# Altium PCB Alarmy.PcbDoc
Units mm, origin at the board's own origin, x right, y up, seen from the top; angles counter-clockwise.
Board outline 68.55 x 53.38 mm, 2 copper layers (Top Layer, Bottom Side); 20 components, 33 nets, 80 pads, 0 vias.
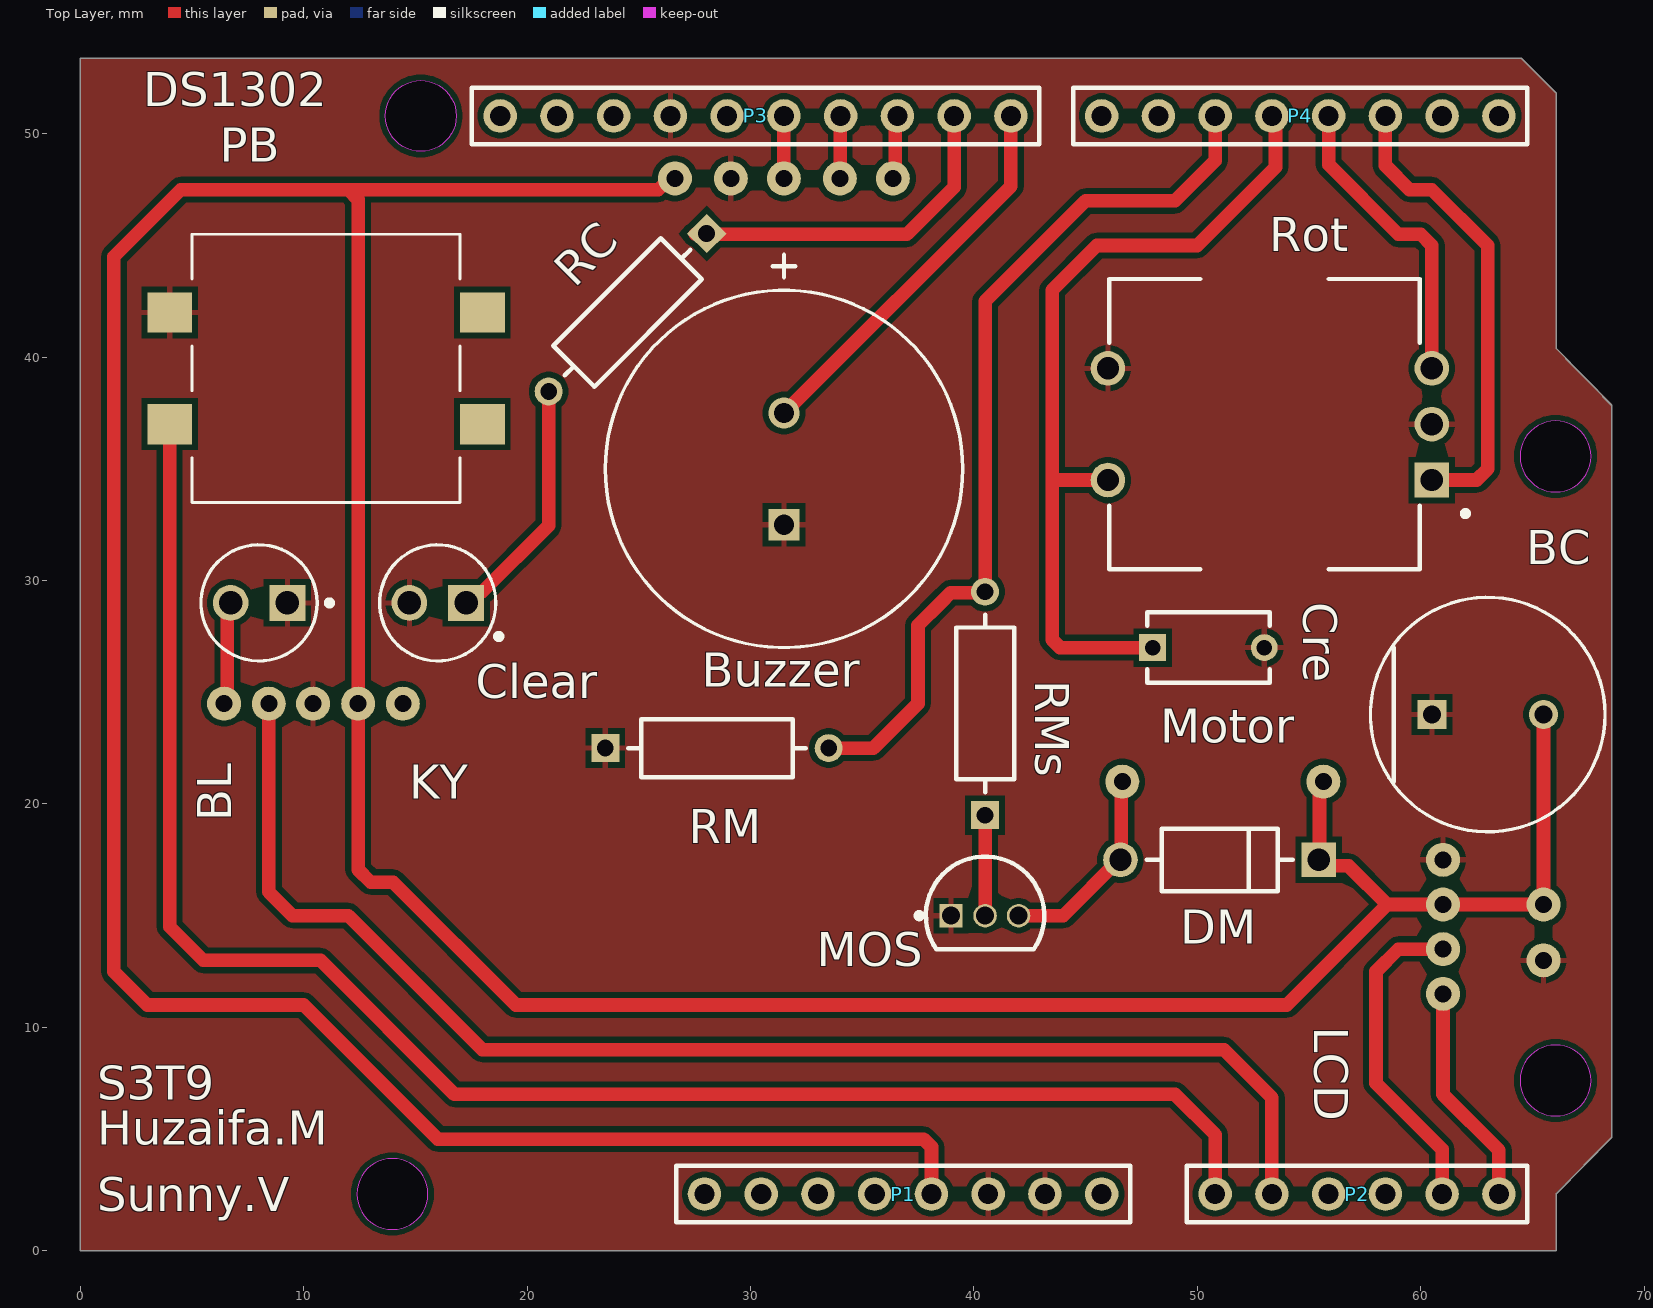
[diagram p0: Top Layer view]
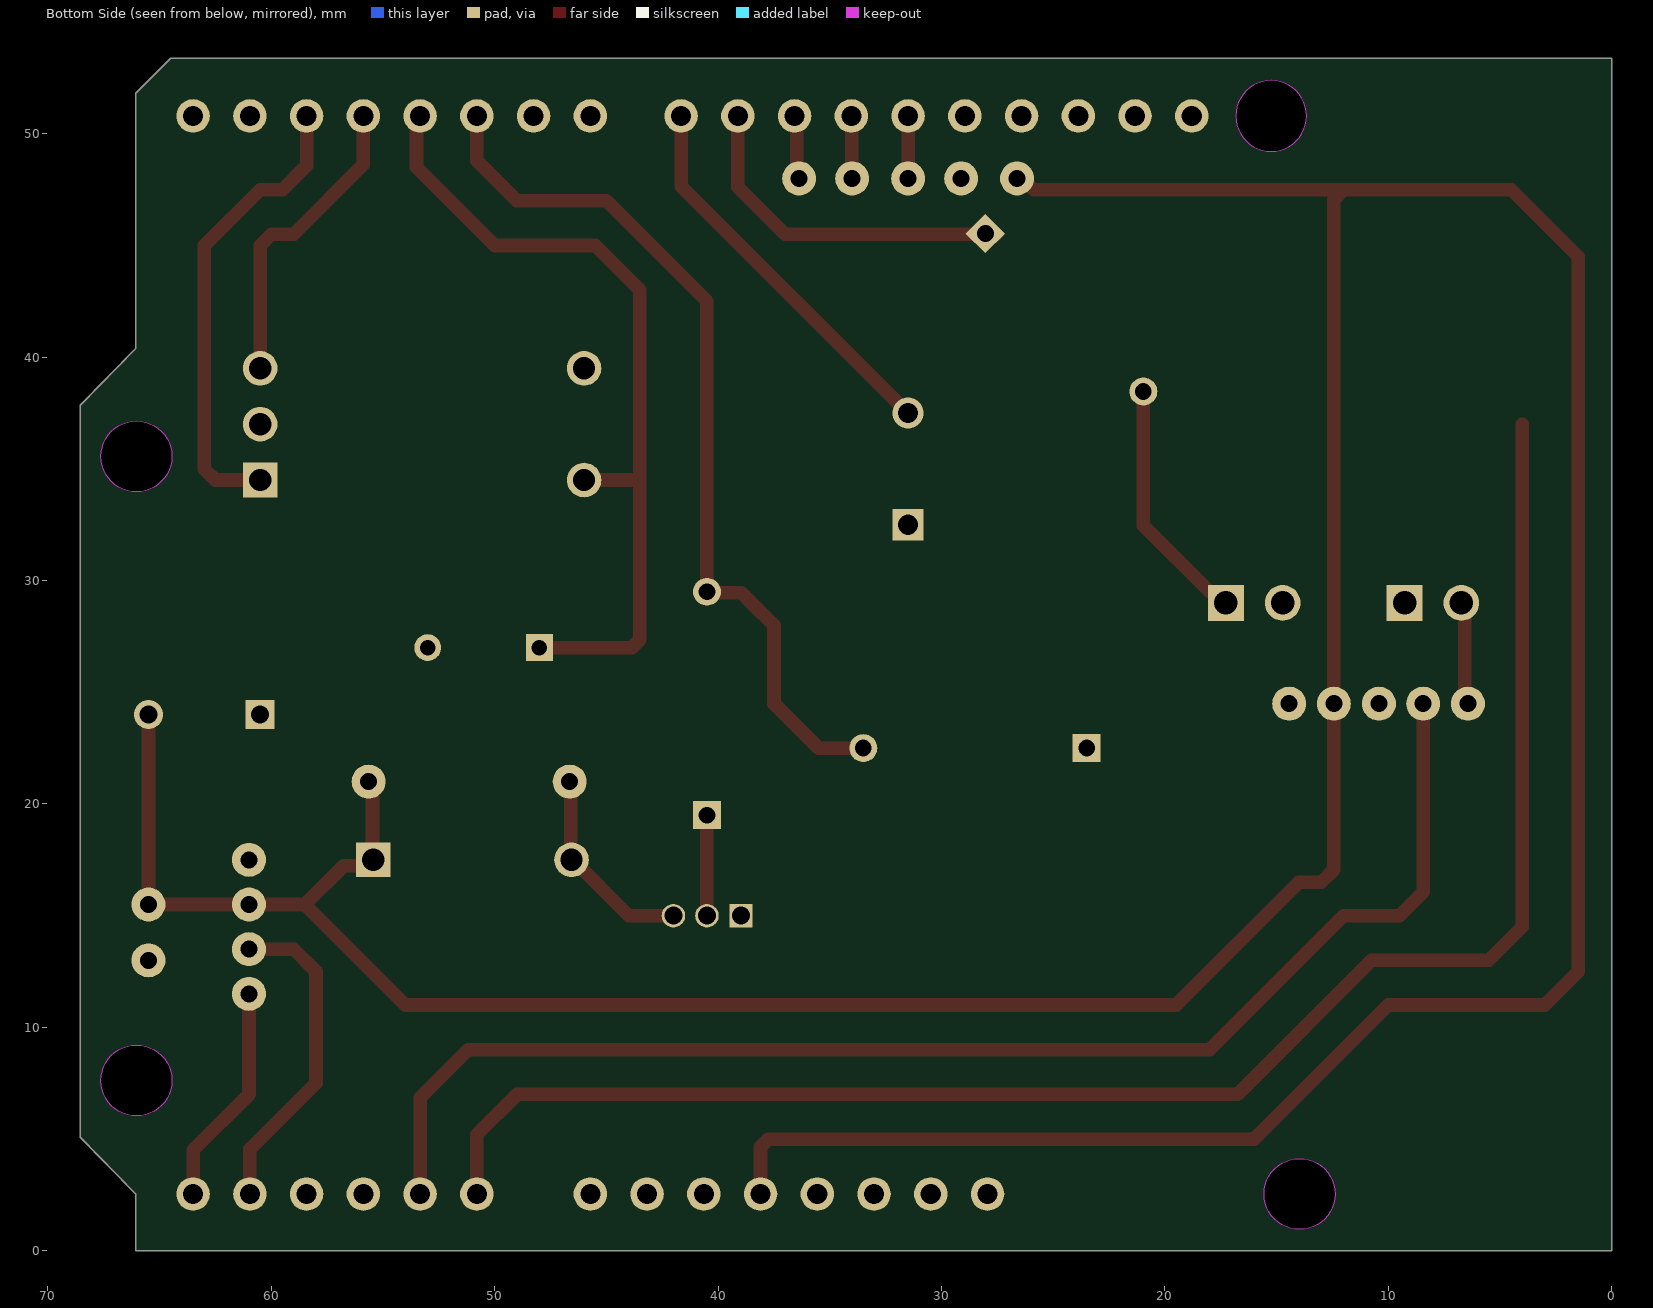
[diagram p1: Bottom Side view, seen from below]
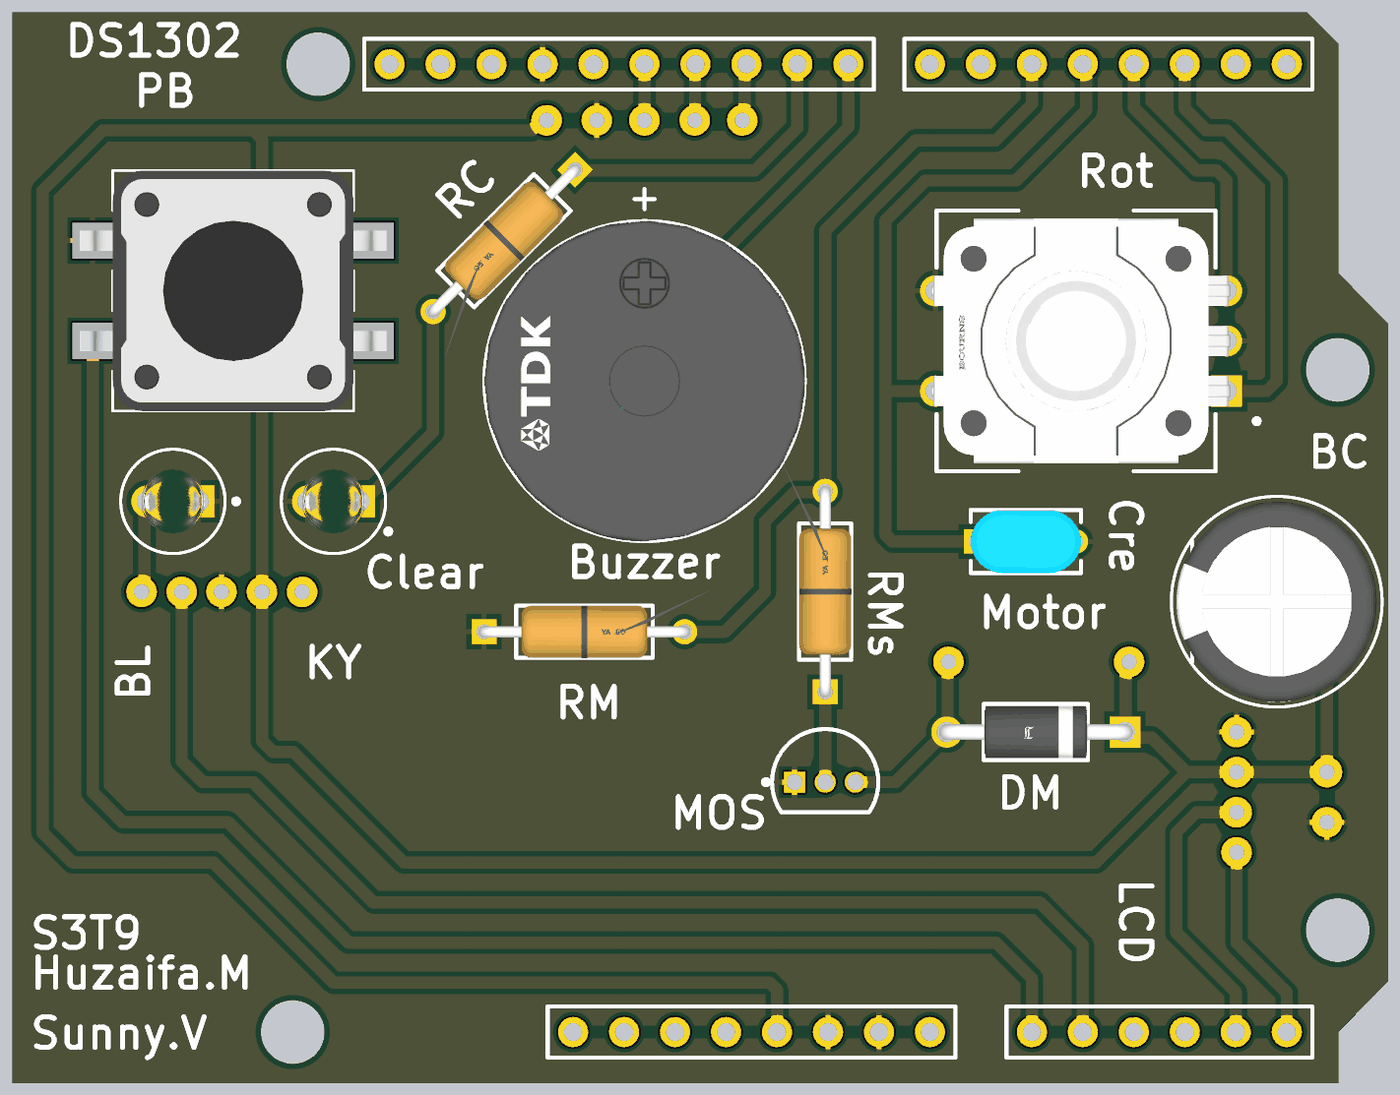
[diagram p2: 3D render of the assembled board from above, using the file's embedded part models]

## Layer stack, top to bottom
Top Layer: signal copper 0.0356
Dielectric 1: dielectric 0.32, FR-4, Dk 4.8
Bottom Side: signal copper (thickness not stored)

## Board outline
0,0 0,53.378 64.505,53.378 66.07,51.814 66.07,40.386 68.55,37.846 68.55,5.08 66.07,2.54 66.07,0
cut-out: 12.383,2.54 ccw(c13.97,2.54) 13.97,0.953 ccw(c13.97,2.54) 15.557,2.54 ccw(c13.97,2.54) 13.97,4.127 ccw(c13.97,2.54)
cut-out: 15.24,49.212 cw(c15.24,50.8) 13.652,50.8 cw(c15.24,50.8) 15.24,52.387 cw(c15.24,50.8) 16.828,50.8 cw(c15.24,50.8)
cut-out: 64.453,35.56 ccw(c66.04,35.56) 66.04,33.972 ccw(c66.04,35.56) 67.627,35.56 ccw(c66.04,35.56) 66.04,37.148 ccw(c66.04,35.56)
cut-out: 64.453,7.62 ccw(c66.04,7.62) 66.04,6.032 ccw(c66.04,7.62) 67.627,7.62 ccw(c66.04,7.62) 66.04,9.207 ccw(c66.04,7.62)

## Design rules (kind name [scope] priority, off if disabled: settings)
Clearance [All] p1: gap=0.254 ignorepadtopadclearanceinfootprint=FALSE
DiffPairsRouting [All] p1: maxlimit=0.254 minlimit=0.254 mostfreqgap=0.254 toplayer_minwidth=0.381 toplayer_maxwidth=0.381 toplayer_prefwidth=0.381 bottomlayer_minwidth=0.381 bottomlayer_maxwidth=0.381 bottomlayer_prefwidth=0.381 substack1={E69F8F93-CCC5-492F-B42F-9A974EFE4D76} toplayer_{e69f8f93-ccc5-492f-b42f-9a974efe4d76}_minwidth=0.381 toplayer_{e69f8f93-ccc5-492f-b42f-9a974efe4d76}_maxwidth=0.381 toplayer_{e69f8f93-ccc5-492f-b42f-9a974efe4d76}_prefwidth=0.381 bottomlayer_{e69f8f93-ccc5-492f-b42f-9a974efe4d76}_minwidth=0.381 bottomlayer_{e69f8f93-ccc5-492f-b42f-9a974efe4d76}_maxwidth=0.381 bottomlayer_{e69f8f93-ccc5-492f-b42f-9a974efe4d76}_prefwidth=0.381 maxuncoupledlength=12.7
PolygonConnect [All] p1: connectstyle=Relief reliefconductorwidth=0.254 reliefentries=4 polygonreliefangle="90 Angle" airgapwidth=0.254
RoutingVias [All] p1: holewidth=25.375 width=25.375 viastyle="Through Hole" minholewidth=25.375 minwidth=25.375 maxholewidth=25.375 maxwidth=25.375
SolderMaskExpansion [All] p1: expansion=0.102 istentingtop=FALSE
SupplyNets "Schematic Supply Nets" [InNet('GND')] p1: voltage=0.000
Width [All] p1: maxlimit=1.27 minlimit=0.61 preferedwidth=0.61 substack1={E69F8F93-CCC5-492F-B42F-9A974EFE4D76}
29 further rules are at their usual default settings.

## Components (designator, comment, footprint, x,y, rotation, side; value= is the part's Value field where it differs from the comment)
BC "ECA1HHG331B" FP-RAD-TH-D_10_0_5-L_16_1-MFG 63,24 r0 top (schematic designator C?)
BL "TLLG4400-AS12" FP-6_544-5255_01-4-MFG 8,29 r180 top (schematic designator Black)
Buzzer "Comment" FP-SD1614T5-A1-MFG 31.5,35 r90 top
Clear "TLLG4400-AS12" FP-6_544-5255_01-4-MFG 16,29 r180 top
Cre "RDER71H105K2K1H03B" FP-RDE2M1-MFG 50.5,27 r0 top
DM "1N4007" FP-1N4007-MFG 51,17.5 r180 top value=15pF (schematic designator D?)
DS1302 "DS1302" DS1302 26.488,46.47 r0 top
KY "IR" CustomIR 10.5,24.5 r0 top (schematic designator *)
LCD "LCD_I2C" LCD_I2C 57.905,20.317 r0 top
MOS "2N7000" ONSC-TO-92-3-29-11 40.5,15 r0 top (schematic designator Q?)
Motor "DC Motor" Motor 54,20.5 r180 top (schematic designator "DC Motor")
P1 "Header 8" HDR1X8 27.94,2.54 r0 top
P2 "Header 6" HDR1X6 50.8,2.54 r0 top
P3 "Header 10" HDR1X10 41.656,50.8 r180 top
P4 "Header 8" HDR1X8 63.5,50.8 r180 top
PB "430172073816" 430172073816 11,39.5 r0 top (schematic designator SW?)
RC "ZOR-25-R-52-0R" FP-ZOR-25-R-52-0R-MFG 24.5,42 r225 top
RM "ZOR-25-R-52-0R" FP-ZOR-25-R-52-0R-MFG 28.5,22.5 r0 top
RMs "ZOR-25-R-52-0R" FP-ZOR-25-R-52-0R-MFG 40.5,24.5 r90 top
Rot "PEC11R-4120K-S0018" FP-PEC11R-4120K-S0018-MFG 53,37 r90 top (schematic designator "Rotary Encoder")

## Footprints (in the part's own frame and the unit in brackets; to place one, negate y for a bottom-side part, rotate by r counter-clockwise, add the part's x,y. Pads: shape width x height; smd on the part's side, far side on the other; paste and mask are expansions set on the pad)
430172073816 [mm] "Tact Switch, SMD, body 12x12mm"
  rect 2x1.8 smd: A1(-7,2.5) A2(7,2.5) B1(-7,-2.5) B2(7,-2.5)
  silkscreen extent -6,-6 6,6, body extent -7.65,-6 7.65,6, height 7.3
CustomIR [mil]
  round 60 hole 30: 5V(76.22,-0.44) AO(-81.26,-0.44) DO(154.96,-0.44) GND(-3.15,-0.44) OUT(-160,-0.44)
DS1302 [mil]
  round 60 hole 30: CLK(197.01,60.24) DAT(295.75,60.24) GND(103.58,60.24) RST(389.17,60.24) VCC(5.16,60.24)
FP-1N4007-MFG [mm]
  rect 1.55x1.55 hole 1 paste-2539.97 mask+0: 1(-4.44,0)
  round 1.55 hole 1 paste-2539.97 mask+0: 2(4.44,0)
  silkscreen extent -3.26,-1.4 3.26,1.4, body extent -5.32,-1.5 5.32,1.5, height 0.25
FP-6_544-5255_01-4-MFG [mm]
  rect 1.6x1.6 hole 1.05 paste-2539.97 mask+0: 1(-1.27,0)
  round 1.6 hole 1.05 paste-2539.97 mask+0: 2(1.27,0)
  silkscreen extent -3.27,-2.6 2.6,2.6, body extent -2.32,-2.32 2.32,2.32, height 0.25
FP-PEC11R-4120K-S0018-MFG [mm]
  round 1.55 hole 1 paste-2539.97 mask+0: 1(-2.5,7) 2(2.5,7) B(2.5,-7.5) C(0,-7.5)
  rect 1.55x1.55 hole 1 paste-2539.97 mask+0: A(-2.5,-7.5)
  silkscreen extent -6.5,-9.13 6.5,6.95, body extent -7,-8.37 7,7.88, height 0.25
FP-RAD-TH-D_10_0_5-L_16_1-MFG [mm]
  rect 1.3x1.3 hole 0.8 paste-2539.97 mask+0: 1(-2.5,0)
  round 1.3 hole 0.8 paste-2539.97 mask+0: 2(2.5,0)
  silkscreen extent -5.25,-5.25 5.25,5.25, body extent -5.35,-5.35 5.35,5.35, height 0.25
FP-RDE2M1-MFG [mm]
  rect 1.2x1.2 hole 0.7 paste-2539.97 mask+0: 1(-2.5,0)
  round 1.2 hole 0.7 paste-2539.97 mask+0: 2(2.5,0)
  silkscreen extent -2.75,-1.58 2.75,1.58, body extent -3.2,-1.68 3.2,1.68, height 0.25
FP-SD1614T5-A1-MFG [mm]
  rect 1.4x1.4 hole 0.9 paste-2539.97 mask+0: 1(-2.5,0)
  round 1.4 hole 0.9 paste-2539.97 mask+0: 2(2.5,0)
  silkscreen extent -8,-8 9.57,8, body extent -8.1,-8.1 8.1,8.1, height 0.25
FP-ZOR-25-R-52-0R-MFG [mm]
  rect 1.25x1.25 hole 0.75 paste-2539.97 mask+0: 1(-5,0)
  round 1.25 hole 0.75 paste-2539.97 mask+0: 2(5,0)
  silkscreen extent -3.98,-1.3 3.98,1.3, body extent -5.72,-1.4 5.72,1.4, height 0.25
HDR1X6 [mm] "Connector; Header; 6 Position"
  round 1.5 hole 0.9: 1(0,0) 2(2.54,0) 3(5.08,0) 4(7.62,0) 5(10.16,0) 6(12.7,0)
  silkscreen extent -1.27,-1.27 13.97,1.27
HDR1X8 [mm] "Connector; Header; 8 Position"
  round 1.5 hole 0.9: 1(0,0) 2(2.54,0) 3(5.08,0) 4(7.62,0) 5(10.16,0) 6(12.7,0) 7(15.24,0) 8(17.78,0)
  silkscreen extent -1.27,-1.27 19.05,1.27
HDR1X10 [mm] "Connector; Header; 10 Position"
  round 1.5 hole 0.9: 1(0,0) 2(2.54,0) 3(5.08,0) 4(7.62,0) 5(10.16,0) 6(12.7,0) 7(15.24,0) 8(17.78,0) 9(20.32,0) 10(22.86,0)
  silkscreen extent -1.27,-1.27 24.13,1.27
LCD_I2C [mil]
  round 60 hole 30: GND(121.85,-110.91) SCL(121.85,-347.13) SDA(121.85,-268.39) VCC(121.85,-189.65)
Motor [mil]
  round 60 hole 30: M1(-64.69,-19.69) M2(289.65,-19.69)
ONSC-TO-92-3-29-11 [mm] "TO, 3-Leads, Body Dia 4.7mm, Pitch 1.27mm"
  rect 1.05x1.05 hole 0.8: 1(-1.524,0)
  round 1.05 hole 0.8: 2(0,0) 3(1.5,0)
  silkscreen extent -3.07,-1.51 2.65,2.65, body extent -2.58,-1.5 2.69,2.61, height 7.87

## Part data
BC: library part CMP-05427-000698-1, "Aluminum Electrolytic Capacitors (Radial Lead Type) AEC-Q200 Qualified 330uF ±20% 50V", Capacitance=330uF, Case/Package=Radial, Max Operating Temperature=105°C, Min Operating Temperature=-55°C, Package Quantity=500, Ripple Current=410mA, Tolerance=20%, Voltage Rating (DC)=50V, Construction=RADIAL, Contact Plating=Tin, Diameter=10mm, Height=16mm, Lead Diameter=0.6mm, Lead Pitch=5mm, Lead/Base Style=Straight, Length=16mm, Life (Hours)=2000Hour, Mount="Through Hole", Packaging="Ammo Pack", Radiation Hardening=No, RoHS Compliant=Yes, Series=NHG, Termination=Radial
BL Clear: library part CMP-02520-000017-1, "LED GREEN DIFFUSED T-1 T/H", Case/Package=T, Color=Green, Forward Current=7mA, Forward Voltage=2.4V, Max Operating Temperature=100°C, Min Operating Temperature=-40°C, Power Dissipation=20mW, Reverse Voltage=20V, Test Current=2mA, Depth=3.2mm, Dominant Wavelength=575nm, Length=3.2mm, Lens Style=Diffused, Luminous Intensity=2mcd, Mount="Through Hole", Number of Elements=1, Number of LEDs=1, Number of Pins=2, Packaging="Tape and Reel", Radiation Hardening=No, RoHS Compliant=No, Viewing Angle=50°
Buzzer: library part CMP-08413-000002-1, "AUDIO PIEZO TRANSDUCER 30V TH", Frequency=4kHz, Max Operating Temperature=70°C, Min Operating Temperature=-10°C, Operating Supply Voltage=3V, Package Quantity=1500, Diameter=17mm, Height=7.5mm, Lead Free="Lead Free", Mount="Through Hole", Packaging=Bulk, RoHS Compliant=Yes, Series=PS, Termination="PC Pins", Voltage Rating=3V, Washable=No
Cre: library part CMP-06035-050824-1, "Ceramic Capacitor 1uF ±10% 50V X7R Radial", Capacitance=1uF, Case/Package=Radial, Dielectric=X7R, Max Operating Temperature=125°C, Min Operating Temperature=-55°C, Package Quantity=500, Resistor Type=Ceramic, Tolerance=10%, Voltage Rating=50V, Height=4mm, Height - Seated (Max)=0.236inch, Lead Diameter=0.5mm, Lead Free="Lead Free", Lead Pitch=0.197inch, Lead/Base Style=Kinked, Length=0.217inch, Mount="Through Hole", Packaging=Bulk, Termination=Radial, Voltage Rating (DC)=50V, Width=0.124inch
DM: library part CMP-123542-000001-1, "Rectifier diode 1000 V 1 A DO-41, ,", Capacitance=15pF, Forward Current=1A, Manufacturer=Diotec, Max Junction Temp=+175°C, Max Repetitive Reverse Voltage=1000V, Max Surge Forward Current=27A, Peak Reverse Current=5uA, Temperature="-50°C to +175°C", Temperature Range Low=-50°C, Automotive=No, Category=Diode, ComponentLink2Description=Datasheet, ComponentLink2URL=https://datasheet.octopart.com/1N4007-Diotec-datasheet-62346875.pdf, Device Class L1="Discrete Semiconductors", Device Class L2=Diodes, Device Class L3="Rectifier Diodes", Height=2.8mm, Ipc Land Pattern Name=DIOAD888W100L520D280, Lead Free=Yes, Manufacturer Part Number=1N4007, Octopart=https://octopart.com/1n4007-diotec-4040411, Package=1N4007, Reverse Voltage=1000V, RoHS=TRUE, Temperature Range High=+175°C
MOS: library part CMP-1058-00936-1, "Small Signal MOSFET, 200 mA, 60 V, N-Channel, 3-Pin TO-92, Bulk Box", Manufacturer="On Semiconductor", Package Type=TO-92, Channel Polarity="N Channel", Ciss Typ (pF)=60, ComponentLink1Description="Manufacturer URL", ComponentLink1URL=http://www.onsemi.com/, ComponentLink2Description=Datasheet, ComponentLink2URL=http://www.onsemi.com/pub_link/Collateral/2N7000-D.PDF, ComponentLink3Description="Package Specification", ComponentLink3URL=http://www.onsemi.cn/pub_link/Collateral/2N6426-D.PDF, Configuration=Single, Coss Typ (pF)=25, Crss Typ (pF)=5, DatasheetVersion="Rev. 8", ID Max (A)=0.2, Mounting Technology="Through Hole", PackageDescription="3-Pin Transistor Outline, Body 4.825 x 3.685 mm, Pitch 1.27 mm", PackageReference=TO-92-3-29-11_AM_SL, PackageVersion="Rev. AM", Packing="Bulk Box", PartNumber=2N7000, PD Max (W)=0.35, V(BR)DSS Min (V)=60, VGS Max (V)=20, VGS(th) Max (V)=3
P1 P4: "Header, 8-Pin", LatestRevisionDate=17-Jul-2002, LatestRevisionNote="Re-released for DXP Platform.", Publisher="Altium Limited"
P2: "Header, 6-Pin", LatestRevisionDate=17-Jul-2002, LatestRevisionNote="Re-released for DXP Platform.", Publisher="Altium Limited"
P3: "Header, 10-Pin", LatestRevisionDate=17-Jul-2002, LatestRevisionNote="Re-released for DXP Platform.", Publisher="Altium Limited"
PB: library part CMP-03913-99472338-4, "Tactile Switch, 0.05A, 12Vdc, 160Gf, Smd Rohs Compliant: Yes", Current Rating=50mA, Insulation Resistance=100MΩ, Max Operating Temperature=85°C, Min Operating Temperature=-40°C, Voltage Rating=12V, Contact Plating=Silver, Height=7.3mm, Packaging="Tape and Reel", RoHS=Compliant
RC RM RMs: library part CMP-03413-000010-1, "RES 0 OHM JUMPER 1/4W AXIAL", Case/Package=Axial, Max Operating Temperature=155°C, Max Power Dissipation=250mW, Min Operating Temperature=-55°C, Package Quantity=5000, Resistance=0mR, Resistor Type="Carbon Film", Temperature Coefficient=100ppm/°C, Tolerance=5%, Construction=Cylindrical, Lead Free="Lead Free", Length=0.248inch, Military Standard=Not, Number of Terminations=2, Packaging="Tape and Reel", Power Rating=250mW, RoHS Compliant=Yes, Series=ZOR, Termination=Axial
Rot: library part CMP-07421-000027-1, "ROTARY ENCODER MECHANICAL 18PPR", Max Operating Temperature=70°C, Min Operating Temperature=-30°C, Package Quantity=75, Built in Switch=Yes, Detent=Yes, Encoder Type=Mechanical, Height=13.4mm, Hole Diameter=1.8mm, Length=26.5mm, Mount="Through Hole", Number of Channels=2, Orientation=Vertical, Output Type=Quadrature, Packaging=Bulk, Pulses per Revolution=18, REACH SVHC="No SVHC", RoHS Compliant=Yes, Termination="PC Pin", Width=12.5mm

## Free pads (board coordinates)
  round 1.524 hole 0.762: 2(65.5,13) 2(65.5,15.5)

## Nets (pads, with @x,y where several pads share a name; then routed paths per layer and width w, separated by ;. In a path a pad name is that pad's centre, name@x,y a point inside that pad or via, vN(x,y) a via of type N, cw(c..) or ccw(c..) an arc to the next point about the centre after c; other vN are vias at no path point)
+3V3: P1.4
+5V: BC.2 DM.1 DS1302.VCC KY.5V LCD.VCC Motor.M1 P1.5 pad.2@65.5,15.5 | length 204.5
  Top Layer w0.61: DS1302.VCC 26.372,48 25.872,47.5 12,47.5 ; P1.5 38.1,4.643 37.743,5 16,5 10,11 3,11 1.5,12.5 1.5,44.5 4.5,47.5 12,47.5 ; Motor.M1@55.5,21 55.47,20.97 55.47,17.53 DM.1 55.712,17.228 56.772,17.228 58.5,15.5 ; BC.2 65.5,15.5 LCD.VCC 58.5,15.5 ; 12,47.5 12.436,47.064 KY.5V 12.436,17.064 13,16.5 14,16.5 19.5,11 54,11 58.5,15.5
AD0: P2.1 PB.B1 | length 75.8
  Top Layer w0.61: PB.B1 4,14.5 5.5,13 10.75,13 16.75,7 49,7 50.8,5.2 P2.1
AD1: KY.AO P2.2 | length 61.5
  Top Layer w0.61: KY.AO 8.436,16.064 9.5,15 12,15 18,9 51.194,9 53.34,6.854 P2.2
AD2: P2.3
AD3: P2.4
AD4/SDA: LCD.SDA P2.5 | length 14.6
  Top Layer w0.61: P2.5 60.96,4.54 58,7.5 58,12.5 59,13.5 LCD.SDA
AD5/SCL: LCD.SCL P2.6 | length 10
  Top Layer w0.61: LCD.SCL 61,7 63.5,4.5 P2.6
AREF: P3.8
GND: BC.1 BL.1 Buzzer.1 Clear.2 Cre.2 DS1302.GND KY.GND LCD.GND MOS.1 P1.6 P1.7 P3.7 pad.2@65.5,13 PB.A1 RM.1 Rot.2 Rot.C
IO2: P4.3 Rot.A | length 21
  Top Layer w0.61: P4.3 58.42,48.58 59.5,47.5 60.5,47.5 63,45 63,35 62.5,34.5 Rot.A
IO3: P4.4 Rot.B | length 13.8
  Top Layer w0.61: P4.4 55.88,48.62 59,45.5 60,45.5 60.5,45 Rot.B
IO4: Cre.1 P4.5 Rot.1 | length 37.4
  Top Layer w0.61: Rot.1 43.5,34.5 ; Cre.1 43.857,27 43.5,27.357 43.5,34.5 ; P4.5 53.5,50.64 53.5,48.5 50,45 45.5,45 43.5,43 43.5,34.5
IO5: P4.6 RM.2 RMs.2 | length 39.9
  Top Layer w0.61: RM.2 35.5,22.5 37.5,24.5 37.5,28 38.5,29 38.961,29.461 40.461,29.461 RMs.2 40.5,42.5 45,47 49,47 50.8,48.8 P4.6
IO6: P4.7
IO7: P4.8
IO8: Buzzer.2 P3.1 | length 17.5
  Top Layer w0.61: Buzzer.2 41.656,47.656 P3.1
IO9: P3.2 RC.1 | length 15.6
  Top Layer w0.61: RC.1@27.536,45.5 37,45.5 39.116,47.616 P3.2
IOREF: P1.2
MISO/IO12: DS1302.CLK P3.5 | length 2.8
  Top Layer w0.61: DS1302.CLK 31.494,48.002 31.494,50.798 P3.5
MOSI/IO11: DS1302.DAT P3.4 | length 2.8
  Top Layer w0.61: DS1302.DAT 34.018,48.018 34.018,50.782 P3.4
Net*_4: BL.2 KY.OUT | length 4.6
  Top Layer w0.61: KY.OUT 6.583,24.636 6.583,28.853 BL.2
NetClear_1: Clear.1 RC.2 | length 11.1
  Top Layer w0.61: Clear.1 17.765,29.495 17.995,29.495 20.964,32.464 RC.2
NetD?_2: DM.2 MOS.3 Motor.M2 | length 9.1
  Top Layer w0.61: MOS.3 44,15 46.5,17.5 DM.2 46.602,17.542 46.602,20.959 Motor.M2
NetQ?_2: MOS.2 RMs.1 | length 4.5
  Top Layer w0.61: MOS.2 RMs.1
RESET: P1.3
RX/IO0: P4.1
SCK/IO13: P3.6
SCL: P3.10
SDA: P3.9
SS/IO10: DS1302.RST P3.3 | length 2.9
  Top Layer w0.61: DS1302.RST 36.474,48.101 36.474,50.698 P3.3
TX/IO1: P4.2
VIN: P1.8
pads on no net: KY.DO P1.1 PB.A2 PB.B2

## Polygon pours and split planes (outlines as drawn)
GND on Top Layer "GND_L01_P000" (solid, pour order 0): 0,53.375 0,0 66.075,0 66.075,2.6 68.55,5.075 68.55,37.9 66.075,40.375 66.075,51.8 64.5,53.375

## Silkscreen, mask and mechanical layers (free items; w line width, h text height)
Top Overlay:
  text "S3T9" at 0.754,6.754 h1.52
  text "Huzaifa.M" at 0.754,4.754 h1.52
  text "Sunny.V" at 0.754,1.762 h1.52
Mechanical 1:
  the board outline again, w0.013
  text "P3 header" at 24.13,54.102 h1.52
  text "P4 header" at 48.26,54.102 h1.52
  text "P1 header" at 30.734,-2.286 h1.52
  text "P2 header" at 51.308,-2.286 h1.52